# EAGLE board emg-arduino (EAGLE 9.3.0)
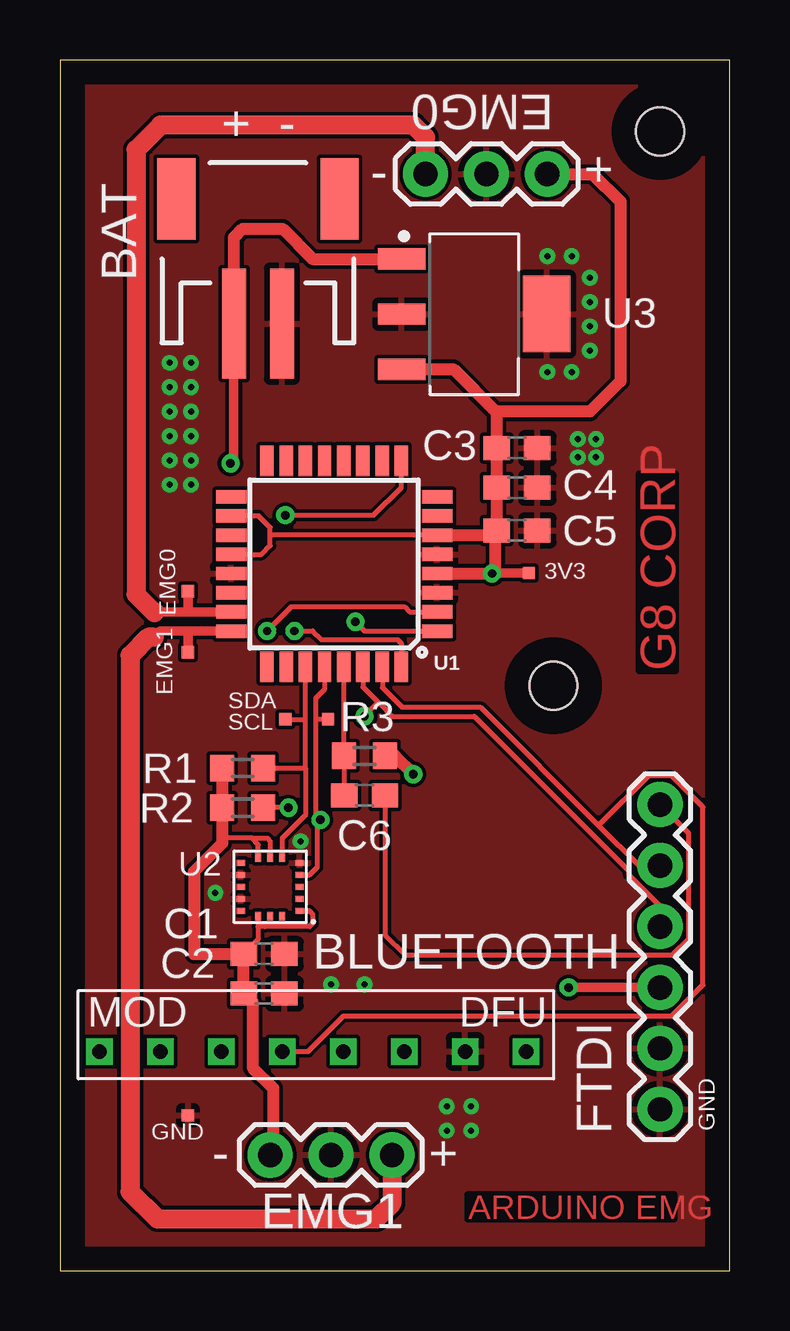
[diagram p0: board, top side]
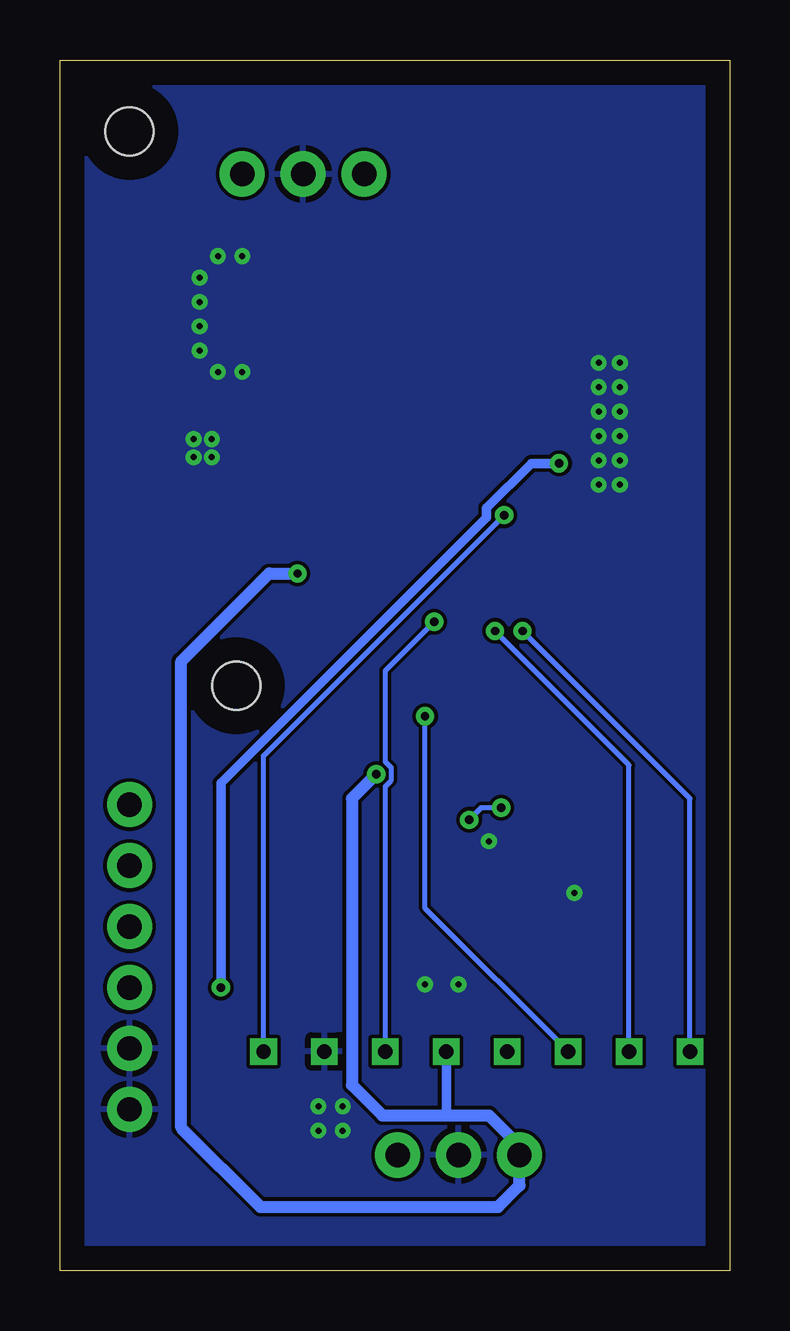
[diagram p1: board, bottom side, seen from below]

Size 27.92 x 50.47 mm. Coordinates in mm from the lower left corner, seen from the top.
Outline: 0,0 27.92,0 27.92,50.47 0,50.47 0,0
Copper layers (1*16): Top 0.035mm / dielectric 1.5mm / Bottom 0.035mm
Design rules "default": minimum track width 6mil, minimum drill 0.35mm, track to track 6mil, track to pad 6mil, pad to pad 6mil, via to via 6mil, smd to smd 6mil, copper to edge 40mil, drill to drill 6mil, minimum pad ring 10mil, minimum via ring 8mil, stop-mask expansion 4mil, vias tented up to drill 0mil, thermal gap 10mil
Holes 2 mm at 25.02,47.5 20.57,24.38

## Footprints (pad centres in the part's own frame; a part is rotated, then mirrored left to right if it is on the bottom)
C0603 = smd 1.1 x 1: 1 -0.85,0; 2 0.85,0
1X06 = drill 1.016 pad 1.88: 1 0,0; 2 2.54,0; 3 5.08,0; 4 7.62,0; 5 10.16,0; 6 12.7,0
JST-2-SMD = smd 1 x 4.6: 1 -1,-3.7; 2 1,-3.7 | smd 1.6 x 3.4: NC1 -3.4,1.5; NC2 3.4,1.5
1X03 = drill 1.016 pad 1.88: 1 0,0; 2 2.54,0; 3 5.08,0
R0603 = smd 1 x 1.1: 1 -0.85,0; 2 0.85,0
PAD.02X.02 = smd 0.508 x 0.508: P$1 0,0
TQFP32-08 = smd 1.27 x 0.559: 1 -4.293,2.8; 2 -4.293,2; 3 -4.293,1.2; 4 -4.293,0.4; 5 -4.293,-0.4; 6 -4.293,-1.2; 7 -4.293,-2; 8 -4.293,-2.8; 17 4.293,-2.8; 18 4.293,-2; 19 4.293,-1.2; 20 4.293,-0.4; 21 4.293,0.4; 22 4.293,1.2; 23 4.293,2; 24 4.293,2.8 | smd 0.559 x 1.27: 9 -2.8,-4.293; 10 -2,-4.293; 11 -1.2,-4.293; 12 -0.4,-4.293; 13 0.4,-4.293; 14 1.2,-4.293; 15 2,-4.293; 16 2.8,-4.293; 25 2.8,4.293; 26 2,4.293; 27 1.2,4.293; 28 0.4,4.293; 29 -0.4,4.293; 30 -1.2,4.293; 31 -2,4.293; 32 -2.8,4.293
LGA-16 = smd 0.35 x 0.25: 1 -1.225,1; 2 -1.225,0.5; 3 -1.225,0; 4 -1.225,-0.5; 5 -1.225,-1; 9 1.225,-1; 10 1.225,-0.5; 11 1.225,0; 12 1.225,0.5; 13 1.225,1 | smd 0.25 x 0.35: 6 -0.5,-1.225; 7 0,-1.225; 8 0.5,-1.225; 14 0.5,1.225; 15 0,1.225; 16 -0.5,1.225
SOT-223 = smd 1.965 x 0.889: 1 -3.023,2.3; 2 -3.023,0; 3 -3.023,-2.3 | smd 1.965 x 3.189: 4 3.023,0
1X8_0.1_PITCH = drill 0.6 square: CTS -5.08,0; DFU 10.16,0; GND 7.62,0; MOD -7.62,0; RTS 5.08,0; RXI 0,0; TXO -2.54,0; VIN 2.54,0

## Placement (x,y rotation side)
C1  10u  [C0603]  8.51,13.21 0 top
C2  100n  [C0603]  8.51,11.56 0 top
C3  1u  [C0603]  19.05,34.29 0 top
C4  1u  [C0603]  19.05,32.64 0 top
C5  100n  [C0603]  19.05,30.86 0 top
C6  100n  [C0603]  12.7,19.81 0 top
J1  [1X06]  25.02,19.43 270 top
J2  [JST-2-SMD]  8.26,43.18 0 top
J3  [1X03]  13.84,4.83 180 top
J4  [1X03]  15.24,45.72 0 top
R1  4k7  [R0603]  7.62,20.96 0 top
R2  4k7  [R0603]  7.62,19.3 0 top
R3  10k  [R0603]  12.7,21.46 180 top
TP1  [PAD.02X.02]  19.56,29.08 0 top
TP2  [PAD.02X.02]  5.33,28.32 0 top
TP3  [PAD.02X.02]  5.33,25.78 0 top
TP4  [PAD.02X.02]  9.4,22.99 0 top
TP5  [PAD.02X.02]  11.18,22.99 0 top
TP6  [PAD.02X.02]  5.33,6.48 0 top
U1  ATMEGA328P_TQFP  [TQFP32-08]  11.43,29.46 180 top
U2  LIS3DH  [LGA-16]  8.76,16 180 top
U3  TC1262  [SOT-223]  17.27,39.88 0 top
U4  BLUEFRUIT-LE  [1X8_0.1_PITCH]  9.27,9.14 0 top

## Library data of the parts
C1-C6 = rcl; SPICEPREFIX: C
J1 J3 J4 TP1-TP6 = SparkFun-Connectors
J2 = SparkFun-Connectors; PROD_ID: CONN-11443
R1-R3 = rcl; SPICEPREFIX: R
U1 = SparkFun-IC-Microcontroller; PROD_ID: IC-09069
U2-U4 = custom

## Nets
!RESET: C6.1 R3.2 U1.29
+3V3: C1.1 C2.1 C3.1 C4.1 C5.1 J3.3 J4.3 R1.1 R2.1 R3.1 TP1.P$1 U1.4 U1.6 U1.18 U1.20 U2.1 U2.7 U2.8 U2.14 U3.3 U4.VIN
AT_RXD: J1.3 U1.30 U4.TXO
AT_TXD: J1.2 U1.31 U4.RXI
CTS: U1.32 U4.CTS
DFU: U1.9 U4.DFU
EMG0: J4.1 TP2.P$1 U1.23
EMG1: J3.1 TP3.P$1 U1.24
GND: C1.2 C2.2 C3.2 C4.2 C5.2 J1.5 J1.6 J2.2 J3.2 J4.2 TP6.P$1 U1.3 U1.5 U1.21 U2.5 U2.10 U2.12 U3.2 U3.4 U4.GND
MISO: U1.16
MOD: U1.2 U4.MOD
MOSI: U1.15
N$6: C6.2 J1.1
RTS: U1.1 U4.RTS
SCK: U1.17
SCL: R2.2 TP5.P$1 U1.28 U2.4
SDA: R1.2 TP4.P$1 U1.27 U2.6
SS: U1.14
VBAT: J1.4 J2.1 U3.1

## Tracks (layer width: path | path; a pad name or v marks a point on that pad's centre or on a via)
!RESET
  Top 0.2: U1.29 11.83,21.48 R3.2 C6.1
+3V3  (via drill 0.35)
  Top 0.2: 7.63,12.7 7.66,12.73 C1.1 8.26,13.8 8.26,14.35 | U1.20 8.4,29.86 8.76,30.23 8.76,30.61 | 8.76,30.61 8.76,30.99 8.29,31.46 U1.18 | U1.6 8.82,30.66 8.76,30.61 | U2.8 8.26,17.77 8,18.03 | 8,18.03 6.77,18.03 | 8,18.03 8.64,18.03 8.76,17.91 U2.7 | U2.14 8.26,14.35 | U2.1 10.4,15 10.54,14.86 10.54,14.48 10.41,14.35 8.53,14.35 8.26,14.35
  Top 0.4: TP1.P$1 18.03,29.08 v18.02,29.06
  Top 0.5: U3.3 16.4,37.58 18.2,35.77 | 18.2,35.77 C3.1 C4.1 C5.1 | U1.6 18,30.66 C5.1 | U1.4 v18.02,29.06 18.16,29.21 18.16,30.82 C5.1 | R3.1 13.97,21.46 v14.73,20.7 | R1.1 R2.1 6.77,18.03 6.77,17.82 5.59,16.64 5.59,13.21 C1.1 C2.1 8.04,11.18 8.04,8.47 8.89,7.62 8.89,4.95 J3.3 | J4.3 22.23,45.72 23.37,44.58 23.37,37.08 22.1,35.81 18.24,35.81 18.2,35.77
  Bottom 0.4: 11.68,6.48 11.81,6.6 U4.VIN
  Bottom 0.5: v18.02,29.06 19.2,29.06 22.86,25.4 22.86,5.97 19.56,2.67 9.65,2.67 8.76,3.56 J3.3 8.76,5.21 10.03,6.48 11.68,6.48 14.48,6.48 15.75,7.75 15.75,19.69 v14.73,20.7
AT_RXD  (via drill 0.35)
  Top 0.2: U1.30 12.63,24.33 13.34,23.62 | 13.34,23.62 13.84,23.11 17.27,23.11 23.7,16.69 23.7,16.52 25.02,15.21 J1.3 | v12.7,23.11 13.21,23.62 13.34,23.62
  Bottom 0.2: U4.TXO 12.7,15.11 v12.7,23.11
AT_TXD
  Top 0.2: U1.31 13.44,25.16 13.44,24.3 14.25,23.5 17.53,23.5 22.48,18.54 | 22.48,18.54 24.13,16.89 J1.2 | U4.RXI 10.35,9.14 11.82,10.62 25.51,10.62 26.8,11.91 26.8,19.33 25.51,20.62 24.52,20.62 22.48,18.58 22.48,18.54
CTS  (via drill 0.35)
  Top 0.2: 14.23,24.89 U1.32 14.23,26.16 14.07,26.31 10.9,26.31 10.54,26.67 v9.78,26.67
  Bottom 0.2: U4.CTS 4.19,21.08 v9.78,26.67
DFU  (via drill 0.35)
  Top 0.2: v9.4,31.5 13.08,31.5 14.23,32.64 U1.9
  Bottom 0.2: U4.DFU 19.43,21.46 v9.4,31.5
EMG0
  Top 0.4: U1.23 5.46,27.46 | 5.46,27.46 3.96,27.46 | TP2.P$1 5.33,27.59 5.46,27.46
  Top 0.8: 3.96,27.46 3.93,27.44 3.17,28.19 3.17,46.74 4.19,47.75 14.73,47.75 15.24,47.24 J4.1
EMG1
  Top 0.4: U1.24 5.33,26.66 | 5.33,26.66 4.18,26.66 3.94,26.42 | TP3.P$1 5.33,26.66
  Top 0.8: 3.94,26.42 3.68,26.42 2.92,25.65 2.92,3.3 4.06,2.16 13.21,2.16 13.84,2.79 J3.1
GND  (via drill 0.25)
  other vias: 20.32,42.29 21.34,42.29 22.1,41.4 22.1,40.39 22.1,39.37 22.1,38.35 21.34,37.46 20.32,37.46 16.13,6.86 17.14,6.86 16.13,5.84 17.14,5.84 21.59,34.67 22.35,34.67 21.59,33.91 22.35,33.91 4.57,37.85 5.46,37.85 4.57,36.83 5.46,36.83 4.57,35.81 5.46,35.81 4.57,34.8 5.46,34.8 4.57,33.78 5.46,33.78 4.57,32.77 5.46,32.77 6.48,15.75 11.3,11.94 12.7,11.94 10.03,17.91
  pour Top: -1.27,50.8 27.94,50.8 29.21,49.53 29.21,0 27.94,-1.27 0,-1.27 -1.27,0
  pour Bottom: -1.27,50.8 27.94,50.8 29.21,49.53 29.21,0 27.94,-1.27 0,-1.27 -1.27,0
MOD  (via drill 0.35)
  Top 0.2: v8.64,26.67 9.65,27.68 14.36,27.68 14.58,27.46 U1.2
  Bottom 0.2: v8.64,26.67 1.65,19.69 U4.MOD
N$6
  Top 0.2: C6.2 13.55,14.01 14.4,13.16 25.51,13.16 26.21,13.86 26.21,18.24 J1.1
RTS  (via drill 0.35)
  Top 0.2: 16.19,26.54 15.85,26.54 U1.1 12.71,26.66 v12.32,27.05
  Bottom 0.2: v12.32,27.05 14.35,25.02 14.35,21.21 14.1,20.96 14.1,20.44 14.35,20.19 U4.RTS
SCL  (via drill 0.35)
  Top 0.2: U2.4 10.41,16.5 10.73,16.83 10.73,18.8 | U1.28 11.05,25.15 11.05,24.26 10.67,23.88 10.67,22.99 | 10.67,22.99 10.67,18.74 10.73,18.8 | v9.53,19.3 R2.2 | TP5.P$1 10.67,22.99 | v10.86,18.8 10.73,18.8
  Bottom 0.2: v10.86,18.8 10.35,19.3 v9.53,19.3
SDA
  Top 0.2: 10.23,20.96 10.23,18.99 9.26,18.03 U2.6 | 10.23,20.96 10.23,22.99 | 10.23,22.99 U1.27 | R1.2 10.23,20.96 | TP4.P$1 10.23,22.99
VBAT  (via drill 0.35)
  Top 0.4: v7.11,33.66 7.24,33.78 7.24,39.46 J2.1 | v21.21,11.81 J1.4
  Top 0.5: J2.1 7.25,43.07 7.62,43.43 9.27,43.43 10.53,42.18 U3.1
  Bottom 0.4: v7.11,33.66 8.27,33.66 10.13,31.8 10.13,31.41 21.21,20.33 v21.21,11.81

## Text on the board
Top: G8 CORP | ARDUINO EMG
tNames: EMG0 | + - | - | + | BAT | 3V3 | EMG0 | EMG1 | SDA | SCL | BLUETOOTH | FTDI | GND | GND | - | + | EMG1